# Allegro board MODULE_RADIO_868M - Copie.brd
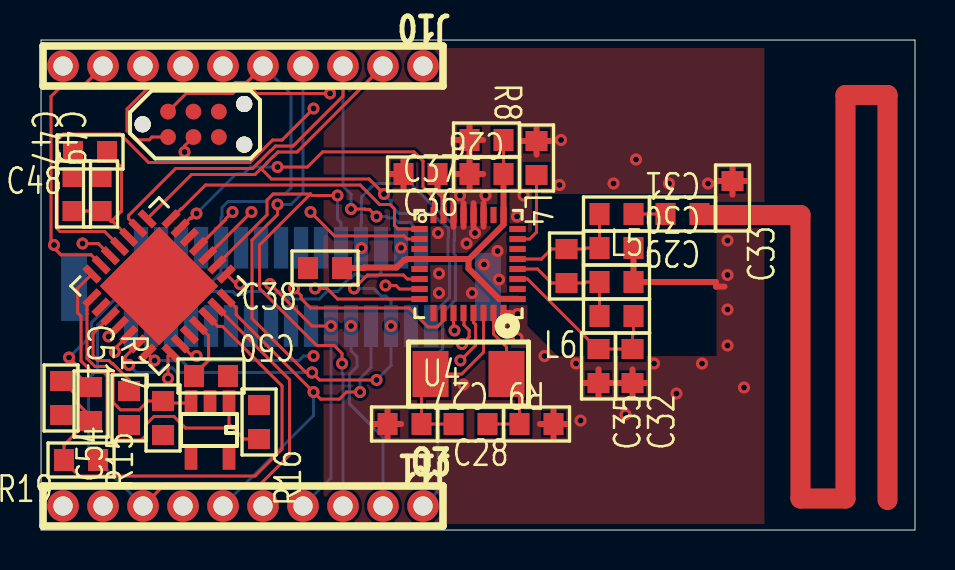
[diagram p0: board, top side]
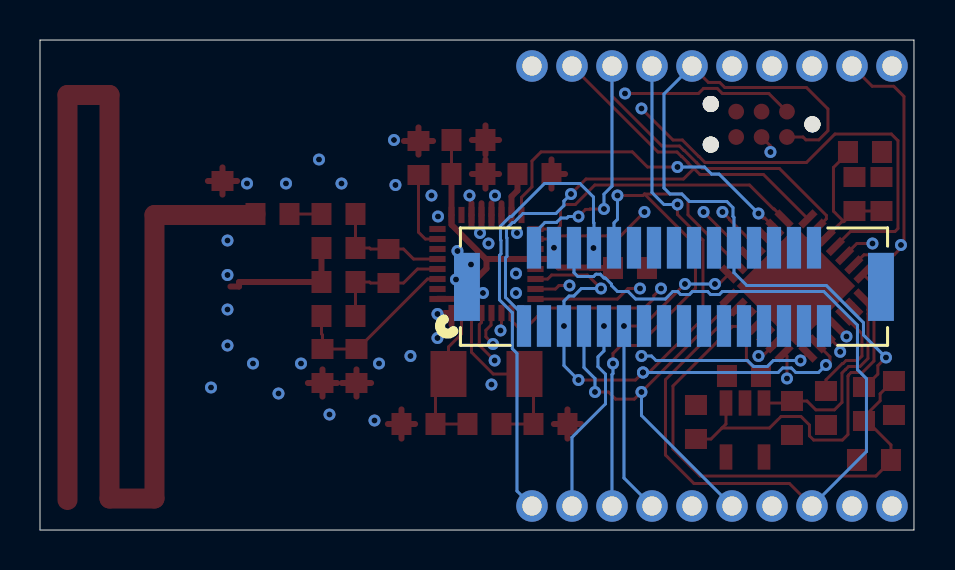
[diagram p1: board, bottom side, seen from below]

Outline 43.7 x 24.5 mm; copper layers: TOP, VCC, NONAME_1, BOTTOM. Coordinates in mm from the lower left corner of the outline.
Outline path: 0,24.5 43.7,24.5 43.7,0 0,0 0,24.5

## Design rules (mm)
nets with their own width: min track width 0.3; nets GND

## Placement (name value [footprint] x y rotation side)
C26  10nF  [RC0603N-M]  18.98 17.8 180 top
C27  22pF  [RC0603N-M]  18.18 5.3 180 top
C28  22pF  [RC0603N-M]  24.78 5.3 0 top
C29  5.6pF  [RC0603N-M]  28.78 12.4 180 top
C30  5.6pF  [RC0603N-M]  28.78 14.1 180 top
C31  22pF  [RC0603N-M]  28.78 15.8 180 top
C32  33pF  [RC0603N-M]  29.58 8.2 90 top
C33  4.7pF  [RC0603N-M]  34.58 16.6 90 top
C35  3.3nF  [RC0603N-M]  27.88 8.2 90 top
C36  33pF  [RC0603N-M]  22.28 17.8 0 top
C37  4.7nF  [RC0603N-M]  22.28 19.5 0 top
C38  33pF  [RC0603N-M]  14.2 13.1 0 top
C47  100nF  [RC0603N-M]  1.62 16.8 270 top
C48  100nF  [RC0603N-M]  2.45 18.9 0 top
C49  100n  [RC0603N-M]  2.98 16.8 270 top
C50  1uF  [RC0603N-M]  8.5 7.7 180 top
C51  1uF  [RC0603N-M]  4.4 6.1 270 top
C54  100nF  [RC0603N-M]  1 6.6 90 top
J9  CON6  [PROGTAGCONNECT]  6.35 19.65 0 top
J9#2  -  [PROGTAGCONNECT#2]  6.35 19.65 0 top
J10  XbeeL  [BARETT10]  19.1 23.2 180 top
J11  XbeeR  [BARETT10]  19.1 1.2 180 top
J12  HEADER 31  [CON9_1X31_DZL_DF9]  4.5 10.2 180 bottom
L4  12nH  [RC0603N-M]  26.28 13.2 270 top
L5  10nH  [RC0603N-M]  32.08 15.8 0 top
L6  12nH  [RC0603N-M]  28.78 10.7 0 top
NOREF  -  []  -111.3 -114.6 0 top
Q3  -  [445C33A16M]  21.38 7.8 0 top
R8  22K  [RC0603N-M]  24.78 18.6 270 top
R9  1M  [RC0603N-M]  21.48 5.3 180 top
R15  470  [RC0603N-M]  2.5 6.3 90 top
R16  2K  [RC0603N-M]  10.9 5.4 90 top
R17  2K  [RC0603N-M]  6.1 5.6 270 top
R19  10K  [RC0603N-M]  2 3.5 0 top
U4  nRF905  [RTM32_2P45X2P45]  21.38 13.3 0 top
U8  24AA02UID  [SOT23-5L]  9.4 6.1 180 top
U9  PIC32MX130F064  [QFN28_6X6MC]  5.9 12.2 225 top

## Library data of the parts
C26-C33 C35-C38 C47-C51 C54 = C
J9 = CON6
J10 J11 = Berg 11p_0
J12 = HEADER 31_0
L4-L6 = INDUCTOR
Q3 = QZS10MEG
R8 R9 R15-R17 R19 = R
U4 = nRF905_4
U8 = 24AA02UID
U9 = PIC32MX13028_0

## Footprints (pads in the part's own frame, mm; a bottom-side part is the same pattern mirrored in y, then rotated)
445C33A16M
  rect 1.8x2.3 smd: 1(1.9,0) 2(-1.9,0)
BARETT10
  round 1.575 hole 0.965: 1(0,0) 2(2,0) 3(4,0) 4(6,0) 5(8,0) 6(10,0) 7(12,0) 8(14,0) 9(16,0) 10(18,0)
CON9_1X31_DZL_DF9
  rect 0.711x2.083 smd: 1(-15,0) 2(-14.5,3.912) 3(-14,0) 4(-13.5,3.912) 5(-13,0) 6(-12.5,3.912) 7(-12,0) 8(-11.5,3.912) 9(-11,0) 10(-10.5,3.912) 11(-10,0) 12(-9.5,3.912) 13(-9,0) 14(-8.5,3.912) 15(-8,0) 16(-7.5,3.912) 17(-7,0) 18(-6.5,3.912) 19(-6,0) 20(-5.5,3.912) 21(-5,0) 22(-4.5,3.912) 23(-4,0) 24(-3.5,3.912) 25(-3,0) 26(-2.5,3.912) 27(-2,0) 28(-1.5,3.912) 29(-1,0) 30(-0.5,3.912) 31(0,0)
  rect 1.295x3.404 smd: 32(-17.851,1.956) 33(2.85,1.956)
PROGTAGCONNECT
  round 0.8 hole 1 unplated: (-1.27,0.635) (3.81,1.651) (3.81,-0.381)
  round 0.787 smd: 1(0,0) 2(0,1.27) 3(1.27,0) 4(1.27,1.27) 5(2.54,0) 6(2.54,1.27)
PROGTAGCONNECT#2
  round 0.8 hole 1 unplated: (-1.27,0.635) (3.81,1.651) (3.81,-0.381)
QFN28_6X6MC
  rect 1.016x0.356 smd: 1(-2.794,1.95) 2(-2.794,1.3) 3(-2.794,0.65) 4(-2.794,0) 5(-2.794,-0.65) 6(-2.794,-1.3) 7(-2.794,-1.95) 15(2.794,-1.95) 16(2.794,-1.3) 17(2.794,-0.65) 18(2.794,0) 19(2.794,0.65) 20(2.794,1.3) 21(2.794,1.95)
  rect 0.356x1.016 smd: 8(-1.95,-2.794) 9(-1.3,-2.794) 10(-0.65,-2.794) 11(0,-2.794) 12(0.65,-2.794) 13(1.3,-2.794) 14(1.95,-2.794) 22(1.95,2.794) 23(1.3,2.794) 24(0.65,2.794) 25(0,2.794) 26(-0.65,2.794) 27(-1.3,2.794) 28(-1.95,2.794)
  rect 4.191x4.191 smd: 29(0,0)
RC0603N-M
  rect 1x1.1 smd: 1(-0.85,0) 2(0.85,0)
RTM32_2P45X2P45
  rect 0.813x0.305 smd: 1(-2.45,1.75) 2(-2.45,1.25) 3(-2.45,0.75) 4(-2.45,0.25) 5(-2.45,-0.25) 6(-2.45,-0.75) 7(-2.45,-1.25) 8(-2.45,-1.75) 17(2.45,-1.75) 18(2.45,-1.25) 19(2.45,-0.75) 20(2.45,-0.25) 21(2.45,0.25) 22(2.45,0.75) 23(2.45,1.25) 24(2.45,1.75)
  rect 0.305x0.813 smd: 9(-1.75,-2.45) 10(-1.25,-2.45) 11(-0.75,-2.45) 12(-0.25,-2.45) 13(0.25,-2.45) 14(0.75,-2.45) 15(1.25,-2.45) 16(1.75,-2.45) 25(1.75,2.45) 26(1.25,2.45) 27(0.75,2.45) 28(0.25,2.45) 29(-0.25,2.45) 30(-0.75,2.45) 31(-1.25,2.45) 32(-1.75,2.45)
SOT23-5L
  rect 0.635x1.27 smd: 1(0,-0.25) 2(0.95,-0.25) 3(1.9,-0.25) 4(1.9,2.45) 5(0,2.45)

## Nets
GND: C26.2 C27.2 C28.2 C29.1 C30.1 C32.1 C33.2 C35.1 C36.1 C37.1 C38.1 C47.1 C48.1 C49.1 C50.1 C51.2 C54.1 J9.5 J10.10 J12.30 J12.31 J12.32 J12.33 R8.1 U4.5 U4.9 U4.16 U4.18 U4.22 U4.24 U4.26 U4.27 U4.28 U4.29 U4.30 U8.2 U9.5(VSS1) U9.16(VSS2) U9.24(AVSS) U9.29(MP)
VCC: C36.2 C37.2 C38.2 C47.2 C48.2 C49.2 C50.2 J9.4 J10.1 J12.28 J12.29 R16.2 R17.2 R19.2 U4.4 U4.17 U4.25 U8.4 U9.10(VDD1) U9.25(AVDD)
AM: U4.7(AM) U9.18(PGED2/RPB10/CTED11/PMD2/RB10)
CD: J10.4 J12.5 U4.6(CD) U9.20(AN12/PMD0/RB12)
CONNECT: J11.8 J12.6 U9.27(VREF+/CVREF+/AN0/C3INC/RPA0/CTE)
CSN: U4.13(CSN) U9.23(AN9/C3INA/RPB15/SCK2/CTED6/PMCS)
DR: U4.8(DR) U9.19(PGEC2/RPB11/PMD1/RB11)
GPIO1: J11.1 J12.8 U9.3(AN4/C1INB/C2IND/RPB2/SDA2/CTED1)
GPIO2: J11.2 J12.9 U9.4(AN5/C1INA/C2INC/RTCC/RPB3/SCL2/)
LINK: J11.6 J12.7 U9.28(VREF-/CVREF-/AN1/RPA1/CTED2/RA1)
MCLR: J9.1 J10.5 J12.22 R15.2
MISO: U4.10(MISO) U9.12(PGEC3/RPB6/PMD6/RB6)
MOSI: U4.11(MOSI) U9.22(CVREFOUT/AN10/C3INB/RPB14/SCK1/)
PGC: J9.2 J11.3 J12.10 U9.2(PGEC1/AN3/C1INC/C2INA/RPB1/CTED)
PGD: J9.3 J11.4 J12.11 U9.1(PGED1/AN2/C1IND/C2INB/C3IND/RPB)
PWP_UP: U4.2(PWP_UP) U9.11(PGED3/RPB5/PMD7/RB5)
RX: J10.3 J12.2 U9.9(SOSCO/RPA4/T1CK/CTED9/RA4)
SCK: U4.12(SCK) U9.21(AN11/RPB13/CTPLS/PMRD/RB13)
SLEEP: J10.9 J12.4 U9.13(TDI/RPB7/CTED3/PMD5/INT0/RB7)
TX: J10.2 J12.1 U9.8(SOSCI/RPB4/RB4)
TX_EN: U4.32(TX_EN) U9.6(OSC1/CLKI/RPA2/RA2)
TXR_CE: U4.1(TXR_CE) U9.7(OSC2/CLKO/RPA3/RA3)
N22054: C26.1 U4.31(DVDD_1V2)
N22098: R8.2 U4.23(IREF)
N22118: C27.1 Q3.2 R9.2 U4.14(XC1)
N22150: C28.1 Q3.1 R9.1 U4.15(XC2)
N22354: C32.2 C35.2 L6.2 U4.19(VDD_PA)
N22358: C29.2 L4.2 L6.1 U4.20(ANT1)
N22362: C30.2 C31.2 L4.1 U4.21(ANT2)
N22586: C31.1 L5.1
N22590: C33.1 L5.2
N31235: C54.2 R15.1 R19.1 U9.26(MCLR)
N32259: R17.1 U8.3(SCA) U9.15(RPB9/SDA1/CTED4/PMD3/RB9)
N32283: R16.1 U8.1(SCL) U9.14(TCK/RPB8/SCL1/CTED10/PMD4/RB8)
N321590: C51.1 U9.17(VCAP)

Pads without a net: J9 6; J10 6 7 8; J11 5 7 9 10; J12 3 12 13 14 15 16 17 18 19 20 21 23 24 25 26 27; U4 3; U8 5

## Via types
v1: diameter 0.6, hole 0.3, TOP to BOTTOM, 77 vias

## Routing (per net, layer and track width the routed paths; a pad name or vN(x,y) marks a point on that pad's centre or on a via; arc(x,y) is an arc through that point)
GND: length 36.8
  TOP w0.3: 21.43,17.07 C36.1 ; C36.1 21.43,18.53 ; C36.1 20.75,17.8 ; C36.1 22.11,17.8 ; 17.33,5.3 17.33,6.03 ; 17.33,5.3 18.01,5.3 ; 17.33,5.3 16.64,5.3 ; 17.33,5.3 17.33,4.57 ; C33.2 35.3,17.45 ; C33.2 34.58,18.13 ; C33.2 33.84,17.45 ; C33.2 34.58,16.77 ; C37.1 21.43,20.23 ; C37.1 21.43,18.77 ; C37.1 20.75,19.5 ; C37.1 22.11,19.5 ; 27.88,6.67 C35.1 ; C35.1 27.15,7.35 ; C35.1 27.88,8.03 ; C35.1 28.61,7.35 ; 28.85,7.35 C32.1 ; C32.1 29.58,8.03 ; C32.1 29.58,6.67 ; C32.1 30.3,7.35 ; 22.12,16.34 U4.27 22.12,15.16 ; 25.62,4.57 25.62,5.3 ; 25.62,5.3 24.95,5.3 ; 25.62,5.3 25.62,6.03 ; 25.62,5.3 26.3,5.3 ; 34.18,12.17 33.75,12.17 33.75,12.4 29.62,12.4 29.62,14.1 ; 21.12,15.16 U4.29 21.12,16.34 ; R8.1 25.51,19.45 ; R8.1 24.78,18.77 ; R8.1 24.78,20.13 ; R8.1 24.05,19.45 ; 17.45,17.8 C26.2 ; C26.2 18.12,18.53 ; C26.2 18.12,17.07 ; 20.62,15.16 U4.30 20.62,16.34 ; 21.62,16.34 U4.28 21.62,15.16 ; 23.12,10.26 U4.16 23.46,10.85
  vias: v1(19.85,14.85) v1(19.9,12.82) v1(19.9,11.85) v1(20.95,16.73) v1(21.12,7.28) v1(21.28,14.32) v1(21.55,11.85) v1(21.7,14.85) v1(22.23,16.73) v1(22.15,13.27) v1(22.83,13.95) v1(22.9,12.52) v1(23.8,15.67) v1(23.83,10.8) v1(23.83,9.6) v1(24.12,16.73) v1(25.18,8.7) v1(25.93,17.25) v1(26,19.5) v1(26.75,8.32) v1(26.98,5.48) v1(28.62,17.32) v1(29.23,5.78) v1(29.75,18.52) v1(30.65,8.32) v1(31.4,17.32) v1(31.78,6.83) v1(33.05,8.32) v1(33.35,17.32) v1(34.33,14.47) v1(34.33,12.75) v1(34.33,11.02) v1(34.33,9.22) v1(35.15,7.12)
VCC: length 27.1
  TOP w0.15: C47.2 C49.2 3.5,15.42 ; 3.5,15.42 3.6,15.42 U9.10 ; 3.5,15.42 4.03,15.94 4.03,18.12 3.3,18.85 C48.2 ; U9.25 8.38,9.72 8.38,8.48 7.65,7.75 C50.2 ; 23.12,17.8 23.12,19.5
  TOP w0.3: C38.2 16.14,13.1 16.17,13.12 17.78,13.12 18.15,13.5 18.24,13.5 18.29,13.55 U4.4 21.41,13.55 ; 21.41,13.55 21.38,13.52 21.38,13.07 22.89,11.56 23.82,11.56 U4.17 ; 21.41,13.55 23.12,15.27 U4.25 23.12,17.8
AM: length 21.8
  TOP w0.15: U4.7 17.93,12.05 17.75,12.22 v1(17.23,12.22) ; U9.18 v1(3.38,9.67)
  NONAME_1 w0.15: v1(3.38,9.67) 3.23,9.52 3.21,9.52 2.9,9.22 2.9,9.2 2.83,9.12 2.83,8.17 3.5,7.5 5.53,7.5 6.21,8.17 7.99,8.17 8,8.19 11.23,8.19 12.72,9.67 16.18,9.67 16.55,10.05 16.55,11.55 v1(17.23,12.22)
CD: length 42.5
  TOP w0.15: v1(11.82,16.27) 11.82,15.77 10.55,14.5 10.55,10.57 13.25,7.88 v1(13.55,7.88) 13.92,7.5 v1(16.78,7.5) ; v1(4.4,8.25) 4.2,8.45 4.2,8.66 4.84,9.3 ; v1(15.65,12.07) 16.32,12.75 18.12,12.75 18.32,12.55 U4.6
  BOTTOM w0.15: v1(4.4,8.25) 4.78,7.88 5.91,7.88 6.13,8.1 6.57,8.1 6.79,7.88 v1(13.55,7.88) ; J10.4 13.1,16.88 12.5,16.27 v1(11.82,16.27) ; v1(15.65,12.07) 16.63,12.07 17.01,11.7 17.24,11.7 17.5,11.44 v1(17.5,10.2) 17.5,8.22 v1(16.78,7.5)
CONNECT: length 44.8
  TOP w0.15: 8.79,11.14 12.42,7.51 12.42,3.75 11,2.33 6.22,2.33 J11.8
  BOTTOM w0.15: J12.6 17,12.87 16.81,12.68 16.02,12.68 15.9,12.79 15.69,12.79 15.5,12.6 15.43,12.6 15.12,12.29 15.12,12.22 14.83,11.92 14.29,11.92 13.92,11.55 12.43,11.55 12.06,11.92 11.82,11.92 11.67,11.77 11.23,11.77 11.08,11.92 10.32,11.92 10.17,11.77 9.73,11.77 9.58,11.92 4.51,11.92 2.83,10.24 2.83,8.02 2.38,7.57 2.38,3.92 J11.8
CSN: length 19.1
  TOP w0.15: v1(7.78,8.7) 7.56,8.7 6.96,9.3 ; v1(20.97,8.47) 21.73,9.24 21.73,10.27 21.62,10.38 U4.13
  VCC w0.15: v1(20.97,8.47) 18.73,8.47 16.48,6.23 10.03,6.23 8.13,8.12 8.13,8.34 v1(7.78,8.7)
DR: length 17.9
  TOP w0.15: U9.19 3.69,9.07 v1(3.69,8.91) ; U4.8 14.82,11.55 14.3,12.07 v1(13.7,12.07)
  NONAME_1 w0.15: v1(3.69,8.91) 4.75,9.97 11.6,9.97 v1(13.7,12.07)
GPIO1: length 32.9
  TOP w0.15: U9.3 v1(10.52,15.9)
  NONAME_1 w0.15: v1(16.03,14.1) 15.42,13.5 13.67,13.5 11.28,15.9 v1(10.52,15.9)
  BOTTOM w0.15: J11.1 19.85,1.95 19.85,8.83 20.08,9.06 20.08,10.86 20.73,11.51 20.73,13.48 20.73,13.48 20.73,13.73 20.65,13.81 20.65,14.48 20.68,14.51 20.68,15.19 20.19,15.67 20.12,15.67 18.48,17.32 16.7,17.32 16.03,16.65 16.03,15.38 16,15.36 J12.8
GPIO2: length 21.4
  TOP w0.15: U9.4 9.22,15.52 9.22,15.54 v1(9.57,15.9)
  NONAME_1 w0.15: v1(15.5,10.2) 15.5,11.47 13.77,13.2 13.55,13.2 11.6,15.15 10.32,15.15 v1(9.57,15.9)
  BOTTOM w0.15: J11.2 17.1,4.63 15.42,6.31 15.42,7.79 15.8,8.17 15.8,8.66 15.5,8.96 v1(15.5,10.2)
LINK: length 20.2
  TOP w0.15: v1(15.95,6.9) 15.28,6.9 14.92,6.54 13.98,6.54 v1(13.62,6.9) 9.76,10.77 9.76,11.1 U9.28
  BOTTOM w0.15: J11.6 13.62,5.73 v1(13.62,6.9) ; J12.7 16.5,8.12 15.95,7.58 v1(15.95,6.9)
MCLR: length 36.6
  TOP w0.15: R15.2 2.45,7.15 1.81,7.79 1.81,8.22 v1(1.4,8.62) ; J10.5 10.28,22.38 9.71,22.38 9.46,22.12 5.37,22.12 4.3,21.05 4.3,19.96 4.76,19.51 5.4,19.51 5.55,19.65 J9.1
  BOTTOM w0.15: J10.5 12.5,21.8 12.5,17.1 12.2,16.8 11.61,16.8 11.23,16.43 9.36,16.43 9.05,16.12 9.05,15.68 9,15.63 J12.22 9,12.87 8.36,12.22 4.38,12.22 2.53,10.37 2.53,9.75 v1(1.4,8.62)
MISO: length 22
  TOP w0.15: U9.12 2.86,14.32 v1(2.08,14.32) ; U4.10 20.12,10.47 19.8,10.15 19.35,10.15 18.4,11.1 13.47,11.1 13,11.57 13,11.72 v1(12.65,12.07)
  NONAME_1 w0.15: v1(12.65,12.07) 10.4,14.32 v1(2.08,14.32)
MOSI: length 17.5
  TOP w0.15: v1(6.35,7.58) 6.35,8.7 6.5,8.84 ; v1(20.68,9.97) 20.62,10.02 U4.11
  NONAME_1 w0.15: v1(20.68,9.97) 20.17,9.97 20.1,9.9 19.97,9.9 19.92,9.85 17.89,9.85 17.27,9.22 13.18,9.22 11.53,7.58 v1(6.35,7.58)
PGC: length 43.5
  TOP w0.15: 13.47,16.8 13.55,16.73 v1(14.82,16.73) ; 13.47,16.8 11.61,16.8 11.3,16.49 11.3,15.76 8.79,13.26 ; 13.47,16.8 10.92,14.25 10.92,12.08 13.78,9.22 14.65,9.22 15.05,8.83 v1(15.05,8.32) ; v1(14.45,21.82) 10.78,21.82 10.52,22.08 9.84,22.08 9.58,21.82 7.26,21.82 J9.2
  NONAME_1 w0.15: v1(14.82,16.73) 14.45,17.1 v1(14.45,21.82)
  BOTTOM w0.15: v1(15.05,8.32) 15.05,7.82 15.1,7.77 J11.3 ; J12.10 15,15.36 14.82,15.53 v1(14.82,16.73)
PGD: length 24.7
  TOP w0.15: v1(9.95,12.3) 9.75,12.3 U9.1 ; v1(7.18,18.9) 7.18,19.2 J9.3 ; v1(14.5,10.2) 13.55,10.2 v1(11.45,12.3)
  VCC w0.15: v1(7.18,18.9) 7.18,15.07 v1(9.95,12.3)
  BOTTOM w0.15: v1(14.5,10.2) 14.5,2.6 13.17,1.27 ; J11.4 13.17,1.27 ; 13.17,1.27 13.17,1.12 ; v1(11.45,12.3) v1(9.95,12.3)
PWP_UP: length 33.8
  TOP w0.15: U9.11 3.18,14.92 0.95,14.92 0.8,15.07 0.8,19.47 1.13,19.8 3.95,19.8 5.38,18.38 10.45,18.38 10.75,18.68 10.76,18.68 11.58,19.5 12.05,19.5 v1(13.62,21.07) ; v1(13.47,15.9) 14.67,14.71 18.15,14.71 18.3,14.55 U4.2
  NONAME_1 w0.15: v1(13.62,21.07) 13.62,16.55 13.47,16.4 v1(13.47,15.9)
RX: length 27.6
  TOP w0.15: J10.3 15.1,21.7 12.6,19.2 11.72,19.2 11.5,18.97 11.48,18.97 10.88,18.38 10.88,18.38 10.57,18.07 6.73,18.07 4.38,15.73 4.38,15.56 4.84,15.09 ; v1(15.5,16.05) 16.2,16.05 16.22,16.03 16.42,16.03 v1(16.78,15.67)
  BOTTOM w0.15: v1(16.78,15.67) 17.28,15.67 17.35,15.6 17.65,15.6 17.87,15.38 18.45,15.38 19,14.83 J12.2 ; J10.3 15.1,17.19 15.5,16.79 v1(15.5,16.05)
SCK: length 19.2
  TOP w0.15: v1(5.68,8.47) 5.57,8.58 5.57,8.58 5.3,8.84 ; U4.12 21.15,10.83 21.15,10.25 21.41,9.99 21.41,9.65 v1(21.05,9.3)
  NONAME_1 w0.15: v1(21.05,9.3) 19.78,8.03 15.88,8.03 15.57,7.73 14.45,7.73 13.98,8.2 13.98,8.34 v1(13.62,8.7)
  BOTTOM w0.15: v1(13.62,8.7) 13.12,8.7 12.9,8.47 8.32,8.47 8.03,8.19 8,8.19 7.99,8.17 7.33,8.17 7.03,8.47 v1(5.68,8.47)
SLEEP: length 33.6
  TOP w0.15: 0.58,14.17 v1(0.65,14.25) ; 0.58,14.17 0.99,13.76 2.5,13.76 3,13.26 ; 0.58,14.17 0.5,14.25 0.5,21.68 1.01,22.19 2.09,22.19 J10.9
  NONAME_1 w0.15: v1(0.65,14.25) 1.25,14.85 2.22,14.85 4.25,16.88 11.97,16.88 12.35,16.49 12.35,15.95 13.67,14.62 16.24,14.62 16.76,14.11 v1(18,14.11)
TX: length 31
  TOP w0.15: 5.3,15.55 7.52,17.77 10.7,17.77 11,18.07 ; 11,18.07 11.53,17.55 16.4,17.55 v1(17.15,16.8) ; 11,18.07 11.02,18.07 11.3,18.35 11.3,18.37 11.61,18.68 11.62,18.68 11.85,18.9 12.8,18.9 J10.2
  BOTTOM w0.15: J12.1 19.5,10.71 20.43,11.63 20.43,13.61 20.35,13.68 20.35,14.61 20.38,14.63 20.38,15.07 20.07,15.38 20,15.38 19.55,15.82 17.9,15.82 17.51,16.22 17.51,16.45 v1(17.15,16.8)
TX_EN: length 16.8
  TOP w0.15: v1(11.82,18.15) 13.32,18.15 14.08,18.9 18.65,18.9 19.1,18.45 19.1,17.16 19.62,16.63 U4.32 ; 6.96,15.09 7.46,15.6 7.55,15.6 v1(7.78,15.82)
  BOTTOM w0.15: v1(11.82,18.15) 10.47,18.15 10.12,17.79 9.74,17.79 v1(7.78,15.82)
TXR_CE: length 14.5
  TOP w0.15: 6.5,15.55 7,16.06 7.03,16.06 8.22,17.25 15.96,17.25 16.93,16.27 17.45,16.27 17.68,16.05 17.68,15.22 17.85,15.05 U4.1
N22054: length 2.2
  TOP w0.3: C26.1 19.83,16.97 20.12,16.67 U4.31
N22098: length 4
  TOP w0.15: R8.2 24.78,14.89 24.43,14.55 U4.23
N22118: length 9.3
  TOP w0.15: R9.2 C27.1 19.03,7.35 Q3.2 21.04,7.8 22.12,8.89 U4.14
N22150: length 7.7
  TOP w0.15: R9.1 C28.1 23.93,7.15 23.28,7.8 23.28,9.15 22.62,9.8 U4.15
N22354: length 8.9
  TOP w0.15: 29.62,10.7 29.62,9.8 29.58,9.75 C32.2 C35.2 27.83,9.05 24.33,12.55 U4.19
N22358: length 6.1
  TOP w0.15: U4.20 24.82,13.05 25.52,12.35 L4.2 27.17,12.35 27.22,12.4 C29.2 L6.1
N22362: length 6
  TOP w0.15: C31.2 C30.2 27.22,14.1 27.17,14.05 L4.1 25.52,14.05 25.02,13.55 U4.21
N22586: length 1.6
  TOP w0.15: 29.62,15.8 L5.1
N22590: length 64
  TOP w1: 32.92,15.8 32.98,15.75 C33.1 37.98,15.75 37.98,1.57 40.23,1.57 40.23,21.75 42.33,21.75 42.33,1.5
N31235: length 25.4
  TOP w0.15: U9.26 8.84,10.18 9.07,10.18 12.05,7.2 12.05,4.05 10.7,2.7 1.9,2.7 1.15,3.45 R19.1 1.15,4.25 2.35,5.45 2.45,5.45 ; 2.45,5.45 2.45,5.7 1.69,6.46 1.69,6.81 1.05,7.45 C54.2 ; 2.45,5.45 R15.1
N32259: length 10.5
  TOP w0.15: 2.54,11.6 2.3,11.36 2.3,11.01 2.29,11 2.29,10.82 2.3,10.81 2.3,8.57 2.7,8.17 3.27,8.17 3.42,8.03 3.43,8.03 3.6,7.85 3.6,6.38 3.97,6.01 4.91,6.01 5.35,6.45 R17.1 6.2,6.45 6.3,6.35 U8.3
N32283: length 19.9
  TOP w0.15: 2.54,12.8 1.83,12.09 1.83,10.85 2,10.69 2,8.45 2.58,7.88 3.14,7.88 3.27,7.74 3.27,7.72 3.3,7.7 3.3,4.78 3.58,4.5 5.02,4.5 5.22,4.71 5.22,5.25 5.65,5.67 6.64,5.67 7.22,5.1 9.6,5.1 ; 9.57,6.3 9.4,6.48 U8.1 9.4,5.3 9.6,5.1 ; R16.1 10.15,4.55 9.6,5.1
N321590: length 5.2
  TOP w0.15: U9.17 2.6,9.82 2.6,8.7 2.83,8.47 3.39,8.47 3.54,8.32 3.58,8.32 4.4,7.51 C51.1

## Copper pours and planes (outline as drawn; the poured copper is in the pictures)
GND on TOP: 14.12,0.3 14.12,24.1 36.18,24.1 36.18,0.3 ; 1 cut-out
